# Altium PCB Submarine_Control.PcbDoc
Units mil, origin at the board's own origin, x right, y up, seen from the top; angles counter-clockwise.
Board outline 2120 x 4320 mil, 2 copper layers (Top Layer, Bottom Layer); 12 components, 44 nets, 144 pads, 26 vias.
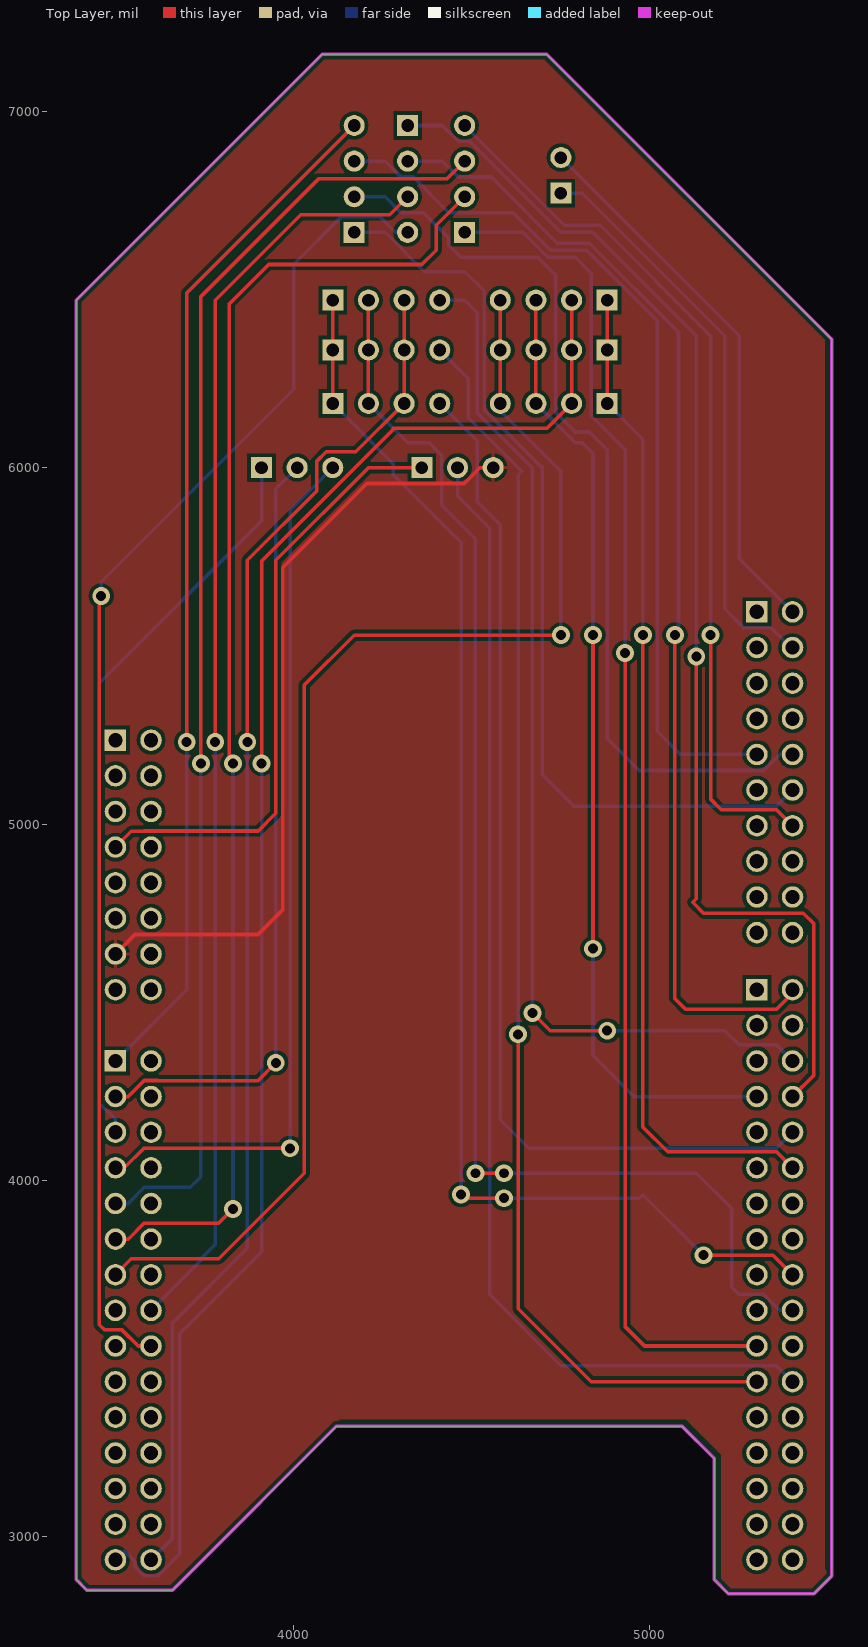
[diagram p0: Top Layer view]
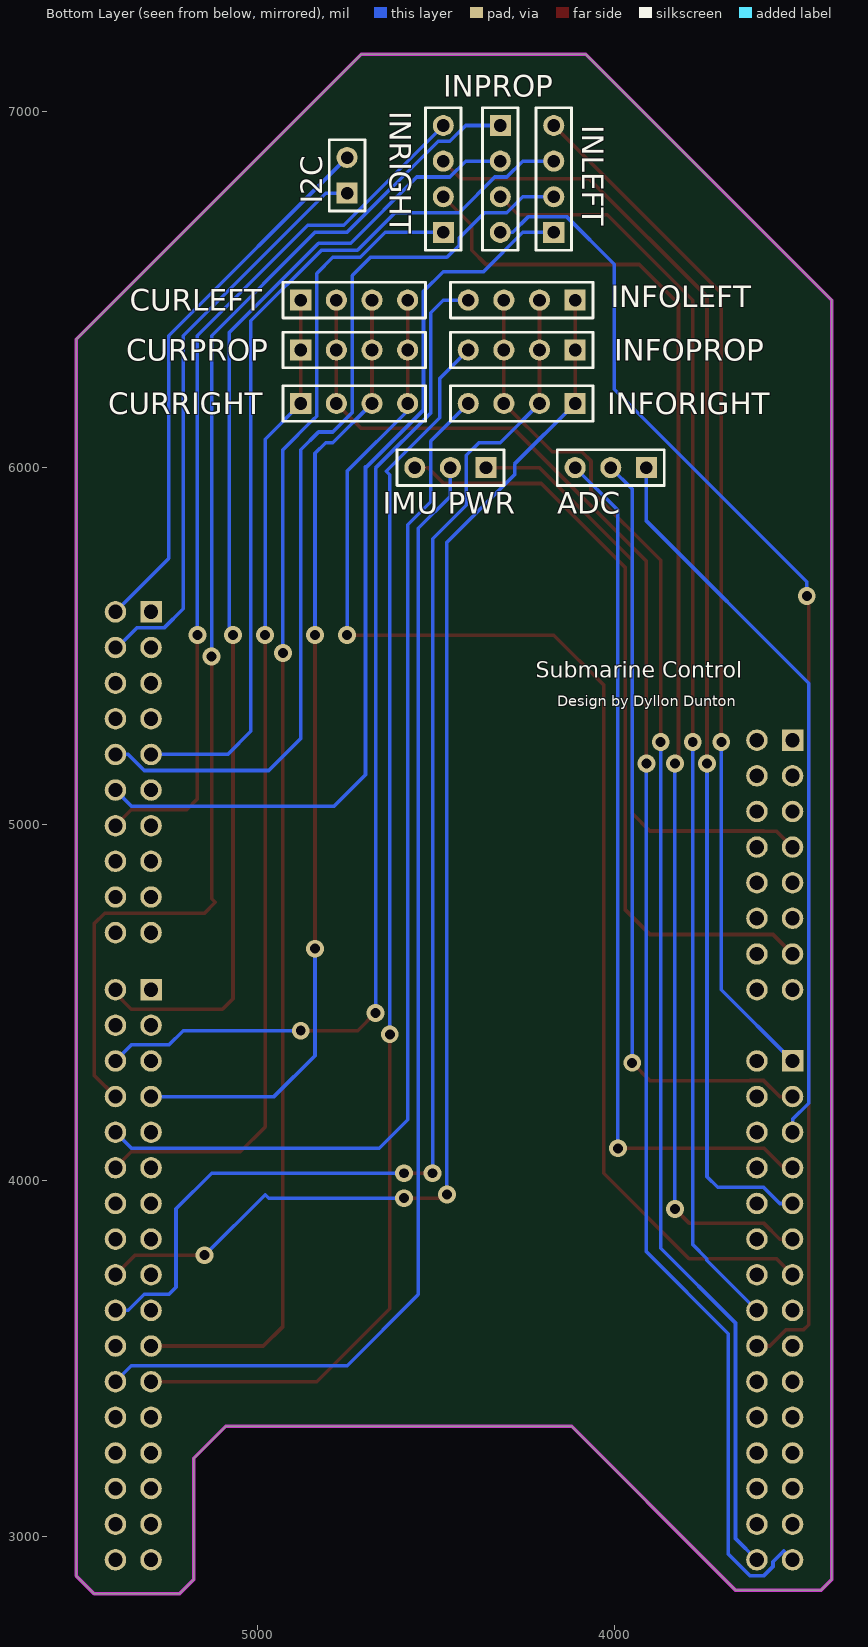
[diagram p1: Bottom Layer view, seen from below]

## Layer stack, top to bottom
Top Solder: solder mask 0.4, Solder Resist, Dk 3.5
Top Layer: signal copper 1.4
Dielectric 1: dielectric 12.6, FR-4, Dk 4.8
Bottom Layer: signal copper 1.4
Bottom Solder: solder mask 0.4, Solder Resist, Dk 3.5

## Board outline
3420,2850 3660,2850 3700,2890 4120,3310 5090,3310 5180,3220 5180,2880 5220,2840 5460,2840 5510,2890 5510,6360 4710,7160 4080,7160 3390,6470 3390,2880

## Design rules (kind name [scope] priority, off if disabled: settings)
Clearance [All] p1: gap=10
HoleSize [All] p1: absolutevalues=TRUE maxlimit=150 minlimit=1 maxpercent=80.000 minpercent=20.000
PolygonConnect [All] p1: connectstyle=Relief reliefconductorwidth=10 reliefentries=4 polygonreliefangle="90 Angle" airgapwidth=10
RoutingVias [All] p1: holewidth=28 width=50 viastyle="Through Hole" minholewidth=28 minwidth=50 maxholewidth=28 maxwidth=50
SolderMaskExpansion [All] p1: expansion=4
Width [All] p1: maxlimit=10 minlimit=10 preferedwidth=10
29 further rules are at their usual default settings.

## Components (designator, comment, footprint, x,y, rotation, side; value= is the part's Value field where it differs from the comment)
ADC "Header 3" HDR1X3 3910,6000 r0 bottom (schematic designator P12)
CURLEFT "LSTEP1" HDR1X4 4880,6470 r180 bottom (schematic designator P1)
CURPROP "PROP1" HDR1X4 4880,6330 r180 bottom (schematic designator P5)
CURRIGHT "RSTEP1" HDR1X4 4880,6180 r180 bottom (schematic designator P9)
I2C "IMU I2C" HDR1X2 4750,6770 r90 bottom (schematic designator P4)
"IMU PWR" "IMU PWR" HDR1X3 4360,6000 r0 bottom (schematic designator P6)
INFOLEFT "LSTEP3" HDR1X4 4110,6470 r0 bottom (schematic designator P3)
INFOPROP "PROP3" HDR1X4 4110,6330 r0 bottom (schematic designator P8)
INFORIGHT "RSTEP3" HDR1X4 4110,6180 r0 bottom (schematic designator P11)
INLEFT "LSTEP2" HDR1X4 4170,6660 r90 bottom (schematic designator P2)
INPROP "PROP2" HDR1X4 4320,6960 r270 bottom (schematic designator P7)
INRIGHT "RSTEP2" HDR1X4 4480,6660 r90 bottom (schematic designator P10)

## Footprints (in the part's own frame and the unit in brackets; to place one, negate y for a bottom-side part, rotate by r counter-clockwise, add the part's x,y. Pads: shape width x height; smd on the part's side, far side on the other; paste and mask are expansions set on the pad)
HDR1X2 [mm] "Connector; Header; 2 Position"
  rect 1.5x1.5 hole 0.9: 1(0,0)
  round 1.5 hole 0.9: 2(2.54,0)
  silkscreen extent -1.27,-1.27 3.81,1.27
HDR1X3 [mm] "Connector; Header; 3 Position"
  rect 1.5x1.5 hole 0.9: 1(0,0)
  round 1.5 hole 0.9: 2(2.54,0) 3(5.08,0)
  silkscreen extent -1.27,-1.27 6.35,1.27
HDR1X4 [mm] "Connector; Header; 4 Position"
  rect 1.5x1.5 hole 0.9: 1(0,0)
  round 1.5 hole 0.9: 2(2.54,0) 3(5.08,0) 4(7.62,0)
  silkscreen extent -1.27,-1.27 8.89,1.27

## Part data
ADC: "Header, 3-Pin"
CURLEFT CURPROP CURRIGHT INFOLEFT INFOPROP INFORIGHT INLEFT INPROP INRIGHT: library part "Header 4", "Header, 4-Pin"
I2C: library part "Header 2", "Header, 2-Pin"
"IMU PWR": library part "Header 3", "Header, 3-Pin"

## Free pads (board coordinates)
  rect 60.24x60.24 / inner round 60.24 / far side rect 60.24x60.24 hole 40.16: CN7_1(5300,5595.2) CN8_1(3500,5235.2) CN9_1(3500,4335.2) CN10_1(5300,4535.2)
  round 60.24 hole 40.16: CN7_2(5400,5595.2) CN7_3(5300,5495.2) CN7_4(5400,5495.2) CN7_5(5300,5395.2) CN7_6(5400,5395.2) CN7_7(5300,5295.2) CN7_8(5400,5295.2) CN7_9(5300,5195.2) CN7_10(5400,5195.2) CN7_11(5300,5095.2) CN7_12(5400,5095.2) CN7_13(5300,4995.2) CN7_14(5400,4995.2) CN7_15(5300,4895.2) CN7_16(5400,4895.2) CN7_17(5300,4795.2) CN7_18(5400,4795.2) CN7_19(5300,4695.2) CN7_20(5400,4695.2) CN8_2(3600,5235.2) CN8_3(3500,5135.2) CN8_4(3600,5135.2) CN8_5(3500,5035.2) CN8_6(3600,5035.2) CN8_7(3500,4935.2) CN8_8(3600,4935.2) CN8_9(3500,4835.2) CN8_10(3600,4835.2) CN8_11(3500,4735.2) CN8_12(3600,4735.2) CN8_13(3500,4635.2) CN8_14(3600,4635.2) CN8_15(3500,4535.2) CN8_16(3600,4535.2) CN9_2(3600,4335.2) CN9_3(3500,4235.2) CN9_4(3600,4235.2) CN9_5(3500,4135.2) CN9_6(3600,4135.2) CN9_7(3500,4035.2) CN9_8(3600,4035.2) CN9_9(3500,3935.2) CN9_10(3600,3935.2) CN9_11(3500,3835.2) CN9_12(3600,3835.2) CN9_13(3500,3735.2) CN9_14(3600,3735.2) CN9_15(3500,3635.2) CN9_16(3600,3635.2) CN9_17(3500,3535.2) CN9_18(3600,3535.2) CN9_19(3500,3435.2) CN9_20(3600,3435.2) CN9_21(3500,3335.2) CN9_22(3600,3335.2) CN9_23(3500,3235.2) CN9_24(3600,3235.2) CN9_25(3500,3135.2) CN9_26(3600,3135.2) CN9_27(3500,3035.2) CN9_28(3600,3035.2) CN9_29(3500,2935.2) CN9_30(3600,2935.2) CN10_2(5400,4535.2) CN10_3(5300,4435.2) CN10_4(5400,4435.2) CN10_5(5300,4335.2) CN10_6(5400,4335.2) CN10_7(5300,4235.2) CN10_8(5400,4235.2) CN10_9(5300,4135.2) CN10_10(5400,4135.2) CN10_11(5300,4035.2) CN10_12(5400,4035.2) CN10_13(5300,3935.2) CN10_14(5400,3935.2) CN10_15(5300,3835.2) CN10_16(5400,3835.2) CN10_17(5300,3735.2) CN10_18(5400,3735.2) CN10_19(5300,3635.2) CN10_20(5400,3635.2) CN10_21(5300,3535.2) CN10_22(5400,3535.2) CN10_23(5300,3435.2) CN10_24(5400,3435.2) CN10_25(5300,3335.2) CN10_26(5400,3335.2) CN10_27(5300,3235.2) CN10_28(5400,3235.2) CN10_29(5300,3135.2) CN10_30(5400,3135.2) CN10_31(5300,3035.2) CN10_32(5400,3035.2) CN10_33(5300,2935.2) CN10_34(5400,2935.2)

## Via types
v1: diameter 50, hole 28, Top Layer to Bottom Layer, 26 vias

## Nets (pads, with @x,y where several pads share a name; then routed paths per layer and width w, separated by ;. In a path a pad name is that pad's centre, name@x,y a point inside that pad or via, vN(x,y) a via of type N, cw(c..) or ccw(c..) an arc to the next point about the centre after c; other vN are vias at no path point)
3V3: "IMU PWR.1" pad.CN8_7 | length 1717
  Top Layer w10: pad.CN8_7 3544.8,4980 3581,4980 3581.31,4980.31 3900.32,4980.31 3950,5030 3950,5740 4210,6000 4360,6000
AI0L: CURLEFT.4 CURPROP.4 CURRIGHT.4 pad.CN9_13 | length 3820.5
  Top Layer w10: pad.CN9_13 3544.8,3780 3581,3780 3581.31,3780.32 3790.32,3780.32 4030,4020 4030,5390 4170,5530 v1(4750,5530) v1@4760,5520 ; CURRIGHT.4 CURPROP.4 CURLEFT.4
  Bottom Layer w10: CURRIGHT.4 4580,6160 4750,5990 v1(4750,5530)
AI0P: 
AI0R: 
AI1L: CURLEFT.3 CURPROP.3 CURRIGHT.3 pad.CN10_7 | length 2705.5
  Top Layer w10: CURRIGHT.3 CURPROP.3 CURLEFT.3 ; v1(4840,4650) v1(4840,5530)
  Bottom Layer w10: CURRIGHT.3 4790,6070 4810,6070 4840,6040 v1(4840,5530) ; v1(4840,4650) 4840,4350 4954.8,4235.2 pad.CN10_7
AI1P: 
AI1R: 
AIN1L: INLEFT.3 pad.CN7_9 | length 2494.2
  Bottom Layer w10: INLEFT.3 4257.03,6860 4301.56,6815.47 4335.47,6815.47 4435.47,6715.47 4615.47,6715.47 4720.94,6610 4821.72,6610 5020,6411.72 5020,5260 5084.8,5195.2 pad.CN7_9
AIN1P: INPROP.3 pad.CN9_16 | length 3569.5
  Top Layer w10: v1(3780,5230) 3780,6470 4020,6710 4270,6710 INPROP.3
  Bottom Layer w10: pad.CN9_16 3740.32,3775.51 3740.32,3780.32 3780,3820 v1(3780,5230)
AIN1R: INRIGHT.3 pad.CN9_9 | length 3638.4
  Top Layer w10: v1(3740,5170) 3740,6480 4070,6810 4430,6810 INRIGHT.3
  Bottom Layer w10: pad.CN9_9 3536.19,3935.2 3581.31,3980.32 3710.32,3980.32 3740,4010 v1(3740,5170)
AIN2L: INLEFT.4 pad.CN9_1 | length 2907.1
  Top Layer w10: pad.CN9_1 pad.CN9_1@3500,4340 ; v1(3700,5230) 3700,6490 INLEFT.4
  Bottom Layer w10: pad.CN9_1 3700,4535.2 v1(3700,5230)
AIN2P: INPROP.4 pad.CN9_18 | length 3764.9
  Top Layer w10: v1(3460,5640) 3454.88,5634.88 3454.88,3595.12 3469.68,3580.32 3518.69,3580.32 3563.81,3535.2 pad.CN9_18
  Bottom Layer w10: v1(3460,5640) 3460,5680 4000,6220 4000,6570.27 4134.26,6704.53 4240.79,6704.53 4285.31,6660 INPROP.4
AIN2R: INRIGHT.4 pad.CN7_14 | length 2495.5
  Top Layer w10: v1(5170,5530) 5170,5070 5199.69,5040.31 5318.69,5040.31 5319,5040 5355.2,5040 pad.CN7_14
  Bottom Layer w10: INRIGHT.4 4480,6959.73 4759.73,6680 4860,6680 5170,6370 v1(5170,5530)
BI0L: CURLEFT.2 CURPROP.2 CURRIGHT.2 pad.CN9_29 | length 4478.7
  Top Layer w10: v1(3910,5170) 3910,5737.03 4280,6107.03 4280,6110 4710,6110 CURRIGHT.2 CURPROP.2 CURLEFT.2
  Bottom Layer w10: pad.CN9_29 3524.83,2960.03 3554.88,2929.98 3554.88,2916.51 3581.31,2890.08 3618.69,2890.08 3680,2951.39 3680,3570 3910,3800 v1(3910,5170)
BI0P: 
BI0R: 
BI1L: CURLEFT.1 CURPROP.1 CURRIGHT.1 pad.CN10_12 | length 2829
  Top Layer w10: CURRIGHT.1 CURPROP.1 CURLEFT.1 ; v1(4980,5530) 4980,4150 5049.69,4080.32 5318.69,4080.32 5319,4080 5355.2,4080 pad.CN10_12
  Bottom Layer w10: CURRIGHT.1 4980,6080 v1(4980,5530)
BI1P: 
BI1R: 
BIN1L: INLEFT.2 pad.CN7_10 | length 2627.1
  Bottom Layer w10: INLEFT.2 4257.03,6760 4301.56,6715.47 4364.53,6715.47 4435.47,6644.53 4435.47,6624.26 4469.73,6590 4684.38,6590 4735.47,6538.9 4735.47,6154.53 4790,6100 4830,6100 4880,6050 4880,5240 4969.92,5150.08 5318.69,5150.08 5363.81,5195.2 pad.CN7_10
BIN1P: INPROP.2 pad.CN10_2 | length 3204.3
  Top Layer w10: v1(5070,5530) 5070,4510 5099.69,4480.31 5318.69,4480.31 5319,4480 5355.2,4480 5400,4524.8 pad.CN10_2
  Bottom Layer w10: INPROP.2 4417.03,6860 4461.56,6815.47 4554.53,6815.47 4740,6630 4830,6630 5080,6380 5080,5540 v1(5070,5530)
BIN1R: INRIGHT.2 pad.CN9_11 | length 3734.5
  Top Layer w10: pad.CN9_11 3536.19,3835.2 3581.31,3880.32 3790.32,3880.32 v1(3830,3920) ; v1(3830,5170) 3830,5180 3820,5190 3820,6460 3930,6570 4360,6570 4400,6610 4400,6680 INRIGHT.2
  Bottom Layer w10: v1(3830,3920) v1(3830,5170)
BIN2L: INLEFT.1 pad.CN7_12 | length 2616.4
  Bottom Layer w10: INLEFT.1 4257.03,6660 4367.03,6550 4480,6550 4535.47,6494.53 4535.47,6161.56 4695.31,6001.72 4698.28,6001.72 4698.28,5138.28 4786.57,5050 5354.8,5050 pad.CN7_12
BIN2P: INPROP.1 pad.CN10_8 | length 3523
  Top Layer w10: v1(5130,5470) 5130,4790 5120,4780 5150,4750 5430,4750 5460,4720 5460,4295.2 pad.CN10_8
  Bottom Layer w10: INPROP.1 4417.03,6960 4461.56,6915.47 4494.53,6915.47 4750,6660 4840,6660 5130,6370 v1(5130,5470)
BIN2R: INRIGHT.1 pad.CN10_21 | length 3789.8
  Top Layer w10: v1(4930,5480) 4930,3590 4984.8,3535.2 pad.CN10_21
  Bottom Layer w10: INRIGHT.1 4642.66,6660 4712.66,6590 4790,6590 4835.47,6544.53 4835.47,6144.26 4844.26,6135.47 4844.53,6135.47 4930,6050 v1(4930,5480)
DL: INFOLEFT.1 INFOPROP.1 INFORIGHT.1 pad.CN10_18 | length 3690.5
  Top Layer w10: INFORIGHT.1 INFOPROP.1 INFOLEFT.1 ; v1(4470,3960) 4480,3950 v1(4590,3950) ; v1(5150,3790) 5345.2,3790 pad.CN10_18
  Bottom Layer w10: INFORIGHT.1 4280,6010 4280,5980 4470,5790 v1(4470,3960) ; v1(4590,3950) 4970,3950 4980,3960 v1(5150,3790)
DP: 
DR: 
DRDY: "IMU PWR.2" pad.CN10_24 | length 3308.7
  Bottom Layer w10: 4460,6000 4460,5920 4550,5830 4550,3680 4749.69,3480.32 5318.69,3480.32 5319,3480 5355.2,3480 pad.CN10_24
FL: INFOLEFT.4 pad.CN10_6 | length 2934.5
  Top Layer w10: v1(4670,4470) 4720,4420 v1(4880,4420)
  Bottom Layer w10: INFOLEFT.4 4480,6470 4515.47,6434.53 4515.47,6153.27 4670,5998.74 v1(4670,4470) ; v1(4880,4420) 5210,4420 5249.69,4380.31 5318.69,4380.31 5319,4380 5355.2,4380 pad.CN10_6
FP: INFOPROP.4 pad.CN10_23 | length 3544.2
  Top Layer w10: v1(4630,4410) 4630,3640 4834.8,3435.2 pad.CN10_23
  Bottom Layer w10: INFOPROP.4 4490,6250 4490,6140 4640,5990 4630,5980 v1(4630,4410)
FR: INFORIGHT.4 pad.CN10_10 | length 2952.3
  Bottom Layer w10: INFORIGHT.4 4515.47,6074.53 4515.47,5904.53 4580,5840 4580,4170 4660,4090 5354.8,4090 pad.CN10_10
GND: "IMU PWR.3" pad.CN8_13 | length 2187.7
  Top Layer w10: pad.CN8_13 3554.8,4690 3900,4690 3970,4760 3970,5720 4205.47,5955.47 4478.44,5955.47 4522.97,6000 4560,6000
LIN_L: ADC.2 pad.CN9_3 | length 2184.4
  Top Layer w10: pad.CN9_3 3536.19,4235.2 3581.31,4280.31 3618.69,4280.31 3619,4280 3900,4280 v1(3950,4330)
  Bottom Layer w10: v1(3950,4330) 3950,5940 ADC.2
LIN_R: ADC.3 pad.CN9_7 | length 2472.4
  Top Layer w10: pad.CN9_7 3525.2,4035.2 3580,4090 v1(3990,4090)
  Bottom Layer w10: v1(3990,4090) 3990,5880 ADC.3
RL: INFOLEFT.3 INFOPROP.3 INFORIGHT.3 pad.CN9_30 | length 3877.5
  Top Layer w10: v1(3870,5230) 3870,5740 4065.47,5935.47 4065.47,6018.44 4091.56,6044.53 4174.53,6044.53 INFORIGHT.3 INFOPROP.3 INFOLEFT.3
  Bottom Layer w10: pad.CN9_30 3660,2995.2 3660,3600 3870,3810 v1(3870,5230)
RP: 
RR: 
SCL_PI: I2C.2 pad.CN7_2 | length 1544
  Bottom Layer w10: I2C.2 5250,6370 5250,5745.2 pad.CN7_2
SDA_PI: I2C.1 pad.CN7_4 | length 1621.7
  Bottom Layer w10: I2C.1 4810,6770 5210,6370 5210,5603.75 5263.67,5550.08 5339.92,5550.08 pad.CN7_4@5394.8,5495.2
SL: INFOLEFT.2 INFOPROP.2 INFORIGHT.2 pad.CN10_20 | length 3787.7
  Top Layer w10: INFORIGHT.2 INFOPROP.2 INFOLEFT.2 ; v1(4510,4020) v1(4590,4020)
  Bottom Layer w10: INFORIGHT.2 4320,6070 4380,6070 4415.47,6034.53 4415.47,5894.53 4510,5800 v1(4510,4020) ; v1(4590,4020) 5130,4020 5230,3920 5230,3700 5249.69,3680.32 5318.69,3680.32 5363.81,3635.2 pad.CN10_20
SP: 
SR: 
VBAT: ADC.1 pad.CN9_5 | length 2072
  Bottom Layer w10: pad.CN9_5 3500,4171.39 3454.88,4216.51 3454.88,5394.88 3910,5850 ADC.1

## Polygon pours and split planes (outlines as drawn)
GND on Top Layer "Top Layer-Ground" (solid, remove dead copper, pour order 4): 4080,7150 3400,6470 3390,6470 3390,2880 3420,2850 3430,2860 3660,2860 4120,3320 4130,3330 5090,3330 5100,3330 5200,3230 5200,2870 5220,2850 5230,2840 5460,2840 5510,2890 5490,2910 5490,6360 4700,7150

## Keep-outs
Keep-Out Layer:
  lines w10: 5180,2880 5180,3220 5090,3310 4120,3310 3700,2890 3660,2850 3430,2850 3420,2850 3390,2880 3390,5270 3390,6470 4080,7160 4710,7160 5510,6360 5510,2890 5460,2840 5220,2840 5180,2880 ; 5180,2880 5180,2880

## Silkscreen, mask and mechanical layers (free items; w line width, h text height)
Bottom Overlay:
  text "Submarine Control" at 4220,5410 h45
  text "Design by Dyllon Dunton" at 4160,5330 h30